# EAGLE board WirelessNRF24 (EAGLE 7.3.0)
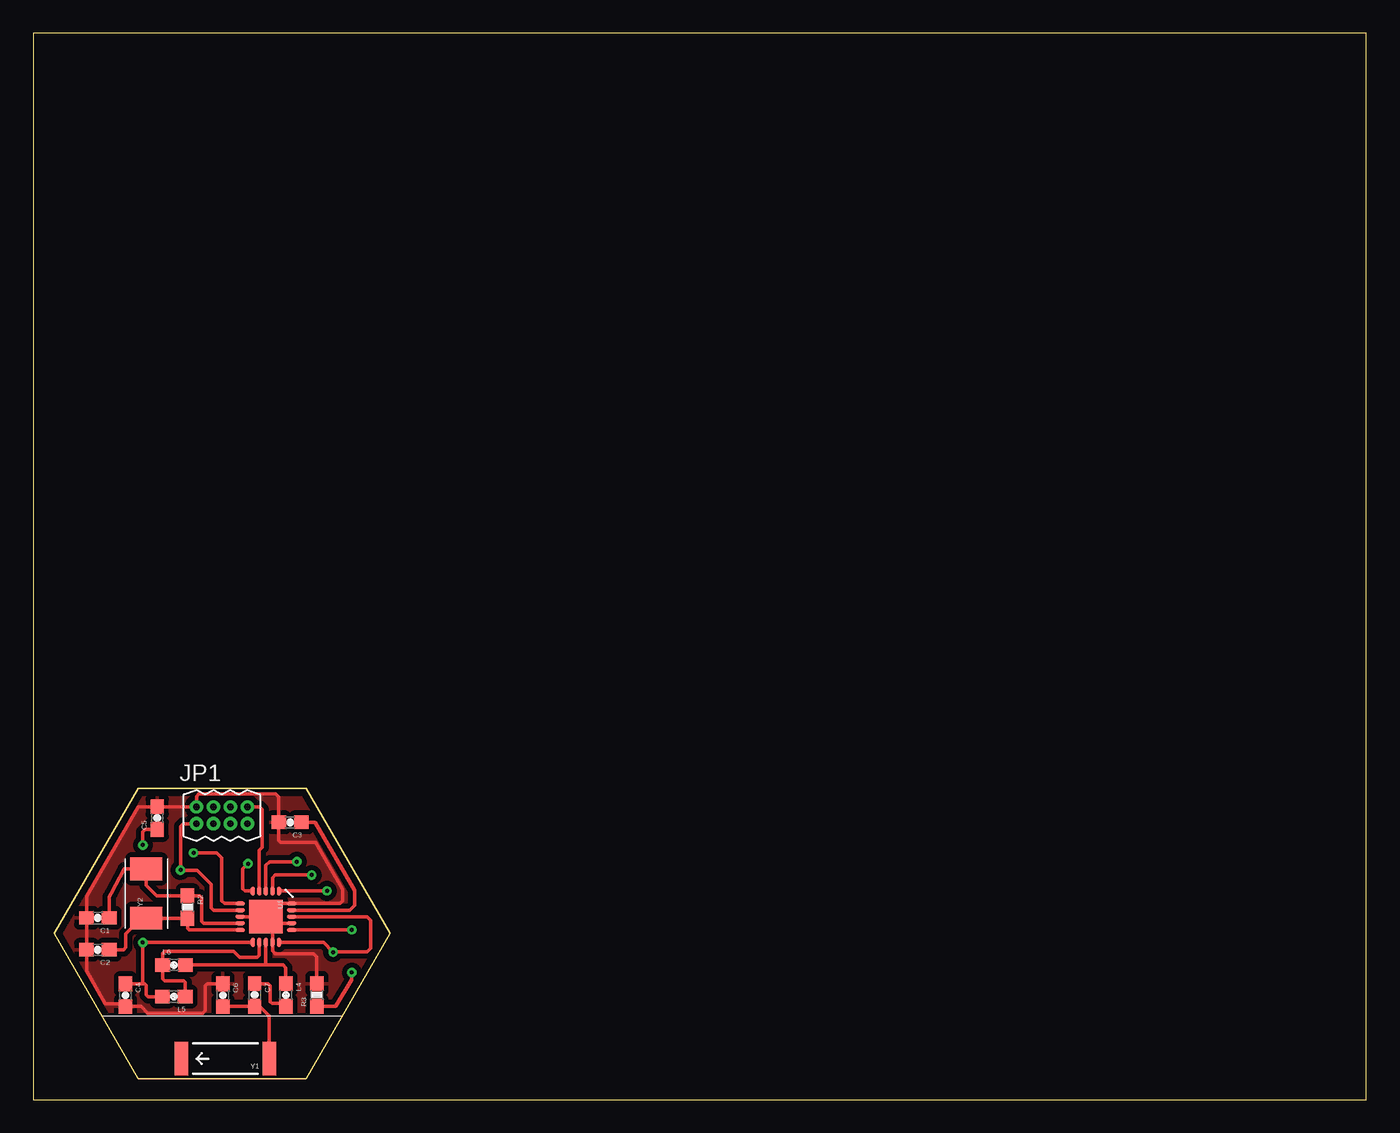
[diagram p0: board, top side]
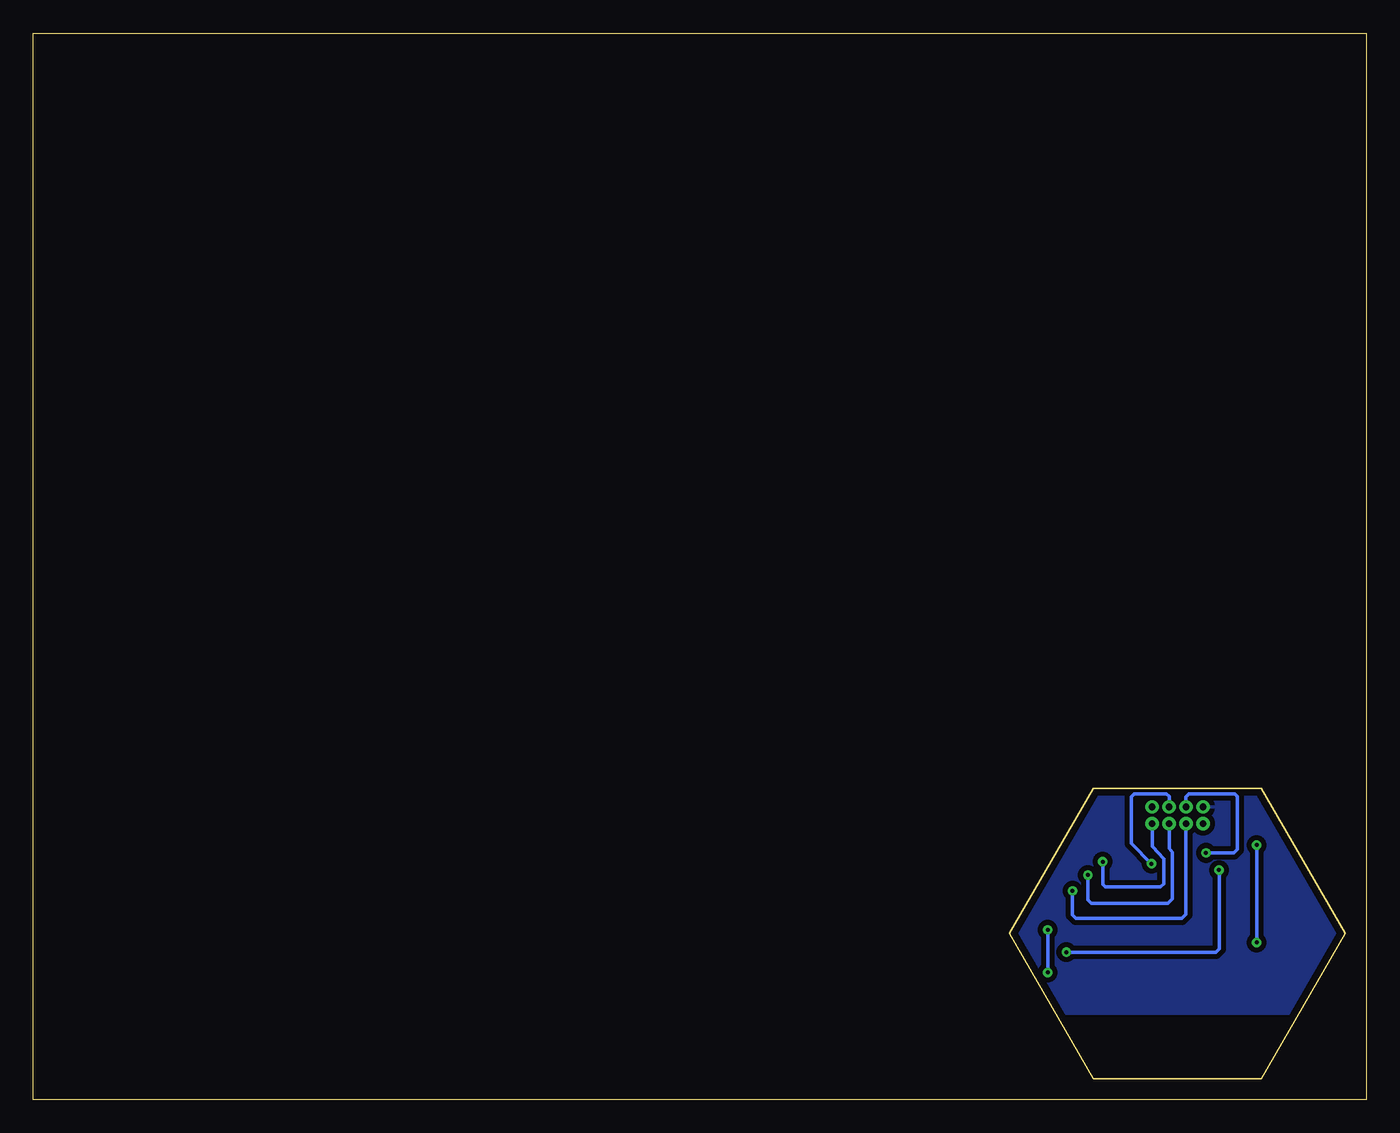
[diagram p1: board, bottom side, seen from below]

Size 100 x 80 mm. Coordinates in mm from the lower left corner, seen from the top.
Outline: 0,0 100,0 100,80 0,80 0,0
Outline: 26.76,12.45 20.47,1.55 7.87,1.55 1.57,12.45 7.87,23.36 20.47,23.36 26.76,12.45
Copper layers (1*16): Top 0.035mm / dielectric 1.5mm / Bottom 0.035mm
Design rules "default *": minimum track width 10mil, minimum drill 24mil, track to track 15mil, track to pad 15mil, pad to pad 15mil, via to via 15mil, smd to smd 15mil, copper to edge 20mil, drill to drill 8mil, minimum pad ring 10mil, minimum via ring 8mil, stop-mask expansion 4mil, vias tented up to drill 0mil, thermal gap 15mil

## Footprints (pad centres in the part's own frame; a part is rotated, then mirrored left to right if it is on the bottom)
0603-CAP = smd 1.1 x 1: 1 -0.85,0; 2 0.85,0
M04X2_0.05" = drill 0.5 pad 0.813: 1 -3.81,0; 2 -3.81,1.27; 3 -2.54,0; 4 -2.54,1.27; 5 -1.27,0; 6 -1.27,1.27; 7 0,0; 8 0,1.27
0603 = smd 1.1 x 1: 1 -0.85,0; 2 0.85,0
0603-RES = smd 1.1 x 1: 1 -0.85,0; 2 0.85,0
QFN20_ALT1 = smd 2.515 x 2.515: 0 0,0 | smd 0.686 x 0.293: 1 -1.925,0.986; 2 -1.925,0.493; 3 -1.925,0; 4 -1.925,-0.493; 5 -1.925,-0.986; 11 1.925,-0.986; 12 1.925,-0.493; 13 1.925,0; 14 1.925,0.493; 15 1.925,0.986 | smd 0.293 x 0.686: 6 -0.986,-1.925; 7 -0.493,-1.925; 8 0,-1.925; 9 0.493,-1.925; 10 0.986,-1.925; 16 0.986,1.925; 17 0.493,1.925; 18 0,1.925; 19 -0.493,1.925; 20 -0.986,1.925
ANTENNA-CHIP5 = smd 1.016 x 2.54: FEED -3.302,0; NC 3.302,0
CRYSTAL-TXC-7A = smd 1.7 x 2.4: P$1 1.85,0; P$2 -1.85,0

## Placement (x,y rotation side)
C1  22pF  [0603-CAP]  4.84,13.63 180 top
C2  22pF  [0603-CAP]  4.84,11.24 180 top
C3  33nF  [0603-CAP]  19.27,20.8 180 top
C4  2.2nF  [0603-CAP]  6.91,7.84 270 top
C5  4.7pF  [0603-CAP]  9.3,21.12 90 top
C6  1.0pF  [0603-CAP]  14.22,7.84 270 top
C7  1.5pF  [0603-CAP]  16.61,7.85 270 top
JP1  [M04X2_0.05"]  16.05,20.69 0 top
L4  3.9nH  [0603]  18.95,7.85 270 top
L5  2.7nH  [0603]  10.54,7.72 180 top
L6  8.2nH  [0603]  10.55,10.1 0 top
R2  1M  [0603-RES]  11.57,14.44 270 top
R3  22K  [0603-RES]  21.27,7.85 90 top
U1  NRF24L01ALT1  [QFN20_ALT1]  17.45,13.72 270 top
Y1  ANTENNA2SMD5  [ANTENNA-CHIP5]  14.4,3.07 180 top
Y2  16MHz  [CRYSTAL-TXC-7A]  8.48,15.46 90 top

## Library data of the parts
C1-C7 R2 R3 Y1 = SparkFun
JP1 = MakerWear
L4-L6 = SparkFun-Passives
U1 = Testing
Y2 = SparkFun-FreqCtrl

## Nets
ANT: C6.2 C7.2 Y1.FEED
CE: JP1.3 U1.1
CSN: JP1.5 U1.2
GND: C1.2 C2.2 C3.2 C4.2 C5.2 C6.1 JP1.2 R3.2 U1.0 U1.8 U1.14 U1.17 U1.20
IRQ: JP1.4 U1.6
MISO: JP1.6 U1.5
MOSI: JP1.8 U1.4
N$1: C1.1 R2.1 U1.9 Y2.P$1
N$2: C2.1 R2.2 U1.10 Y2.P$2
N$3: L5.1 L6.1 U1.12
N$4: R3.1 U1.16
N$5: C3.1 U1.19
N$6: L4.1 L6.2 U1.13
N$7: C4.1 C5.1 L5.2 U1.11
N$9: C7.1 L4.2
SCK: JP1.7 U1.3
VCC: JP1.1 U1.7 U1.15 U1.18

## Tracks (layer width: path | path; a pad name or v marks a point on that pad's centre or on a via)
ANT
  Top 0.254: C6.2 16.6,6.99 C7.2 16.98,7 17.7,6.27 Y1.FEED
CE  (via drill 0.3 pad 0.25)
  Top 0.254: v22.04,15.66 U1.1
  Bottom 0.254: v22.04,15.66 22.04,13.86 21.78,13.6 13.82,13.6 13.53,13.89 JP1.3
CSN  (via drill 0.3 pad 0.25)
  Top 0.254: v20.88,16.84 18.14,16.84 17.95,16.65 U1.2
  Bottom 0.254: v20.88,16.84 20.89,16.83 20.89,14.99 20.61,14.71 14.87,14.71 14.53,15.05 14.53,18.53 14.78,18.83 JP1.5
GND
  Top 0.254: 17.31,13.26 U1.0 | U1.0 17.51,14.64 17.57,14.7 U1.20 23.01,14.7 23.2,14.9 23.2,15.79 21.17,19.28 21.16,19.29 18.55,19.29 18.42,19.43 C3.2 18.42,22.69 18.17,22.94 12.42,22.94 12.24,22.76 JP1.2 C5.2 7.86,21.97 3.99,15.24 3.99,15.15 C1.2 C2.2 3.99,9.65 5.41,7.19 6.92,7.19 C4.2 8.09,6.99 8.6,6.48 12.71,6.48 12.88,6.64 12.88,8.53 13.03,8.69 C6.1 | 17.5,13.7 U1.0 | R3.2 21.26,8.71 21.26,10.71 21.03,10.94 18.15,10.94 17.94,11.14 U1.14 17.94,13.22 | 17.94,13.22 U1.0 | U1.8 U1.0 | U1.17 17.94,13.22
  pour Top: 1.85,12.42 8.04,23.15 20.27,23.15 26.43,12.46 23.04,6.52 5.28,6.52
  pour Bottom: 1.7,12.42 5.19,6.35 23.14,6.35 26.68,12.45 20.41,23.28 7.91,23.28
IRQ  (via drill 0.3 pad 0.25)
  Top 0.254: U1.6 14.36,14.7 14.13,14.92 14.13,18.15 13.75,18.5 v12.01,18.5
  Bottom 0.254: JP1.4 13.51,22.72 13.3,22.94 9.87,22.94 9.66,22.73 9.66,18.76 9.92,18.5 v12.01,18.5
MISO  (via drill 0.3 pad 0.25)
  Top 0.254: v16.1,17.69 16.23,17.83 15.71,17.31 15.71,15.82 15.89,15.65 U1.5
  Bottom 0.254: JP1.6 14.78,22.73 14.99,22.94 17.39,22.94 17.61,22.71 17.61,19.2 v16.1,17.69
MOSI
  Top 0.254: U1.4 16.96,18.71 17.17,18.92 17.17,21.78 16.99,21.96 JP1.8
N$1
  Top 0.254: C1.1 5.69,15.2 5.83,15.48 6.82,17.3 Y2.P$1 8.48,16.08 9.27,15.29 R2.1 11.58,15.28 12.48,15.28 12.64,15.13 12.64,13.36 12.77,13.22 U1.9
N$2
  Top 0.254: C2.1 6.77,11.24 6.95,11.42 6.95,12.43 7.46,12.95 Y2.P$2 11.55,13.61 R2.2 11.57,12.85 11.69,12.73 U1.10
N$3
  Top 0.254: L5.1 11.39,8.78 11.27,8.9 9.84,8.9 9.7,9.04 L6.1 9.7,10.97 9.84,11.11 15.05,11.11 15.49,10.67 16.8,10.67 16.96,10.82 U1.12
N$4  (via drill 0.3 pad 0.25)
  Top 0.254: U1.16 v23.89,12.73 | R3.1 22.67,7 23.89,8.98 v23.89,9.54
  Bottom 0.254: v23.89,12.73 v23.89,9.54
N$5
  Top 0.254: C3.1 21.15,20.8 24.09,15.7 24.09,14.58 23.72,14.21 U1.19
N$6
  Top 0.254: U1.13 17.45,10.1 | 18.97,8.72 L4.1 18.95,9.89 18.75,10.1 17.45,10.1 | L6.2 17.45,10.1
N$7  (via drill 0.3 pad 0.25)
  Top 0.254: C4.1 8.35,8.69 | 8.35,8.69 8.47,8.56 8.47,7.87 8.62,7.72 L5.2 | U1.11 v8.22,11.79 | v8.22,11.79 | v8.22,19.09 8.22,20.09 8.38,20.26 9.28,20.26 C5.1 | v8.22,11.79 8.22,8.81 8.35,8.69
  Bottom 0.254: v8.22,11.79 v8.22,19.09
N$9
  Top 0.254: C7.1 17.63,8.7 17.78,8.55 17.78,7.31 17.92,7.2 18.95,7.2 L4.2
SCK  (via drill 0.3 pad 0.25)
  Top 0.254: U1.3 17.45,17.56 17.73,17.84 v19.76,17.84
  Bottom 0.254: v19.76,17.84 19.75,17.83 19.75,16.13 19.56,15.94 15.43,15.94 15.19,16.18 15.19,18.07 16.05,18.99 JP1.7
VCC  (via drill 0.3 pad 0.25)
  Top 0.254: JP1.1 11.24,20.69 11.05,20.5 v11.05,17.22 11.06,17.21 12.28,17.21 13.36,16.13 13.36,14.38 13.53,14.21 U1.7 | U1.18 25.04,13.72 25.31,13.45 25.31,11.34 25.04,11.07 22.47,11.07 | U1.15 21.76,11.79 22.47,11.07 | v22.49,11.06 22.47,11.07
  Bottom 0.254: v22.49,11.06 11.28,11.06 11.04,11.3 11.04,17.21 v11.05,17.22